# Altium PCB PCB1.PcbDoc
Units mil, origin at the board's own origin, x right, y up, seen from the top; angles counter-clockwise.
Board outline 6000 x 4000 mil, 2 copper layers (Top Layer, Bottom Layer); 21 components, 14 nets, 47 pads, 0 vias.
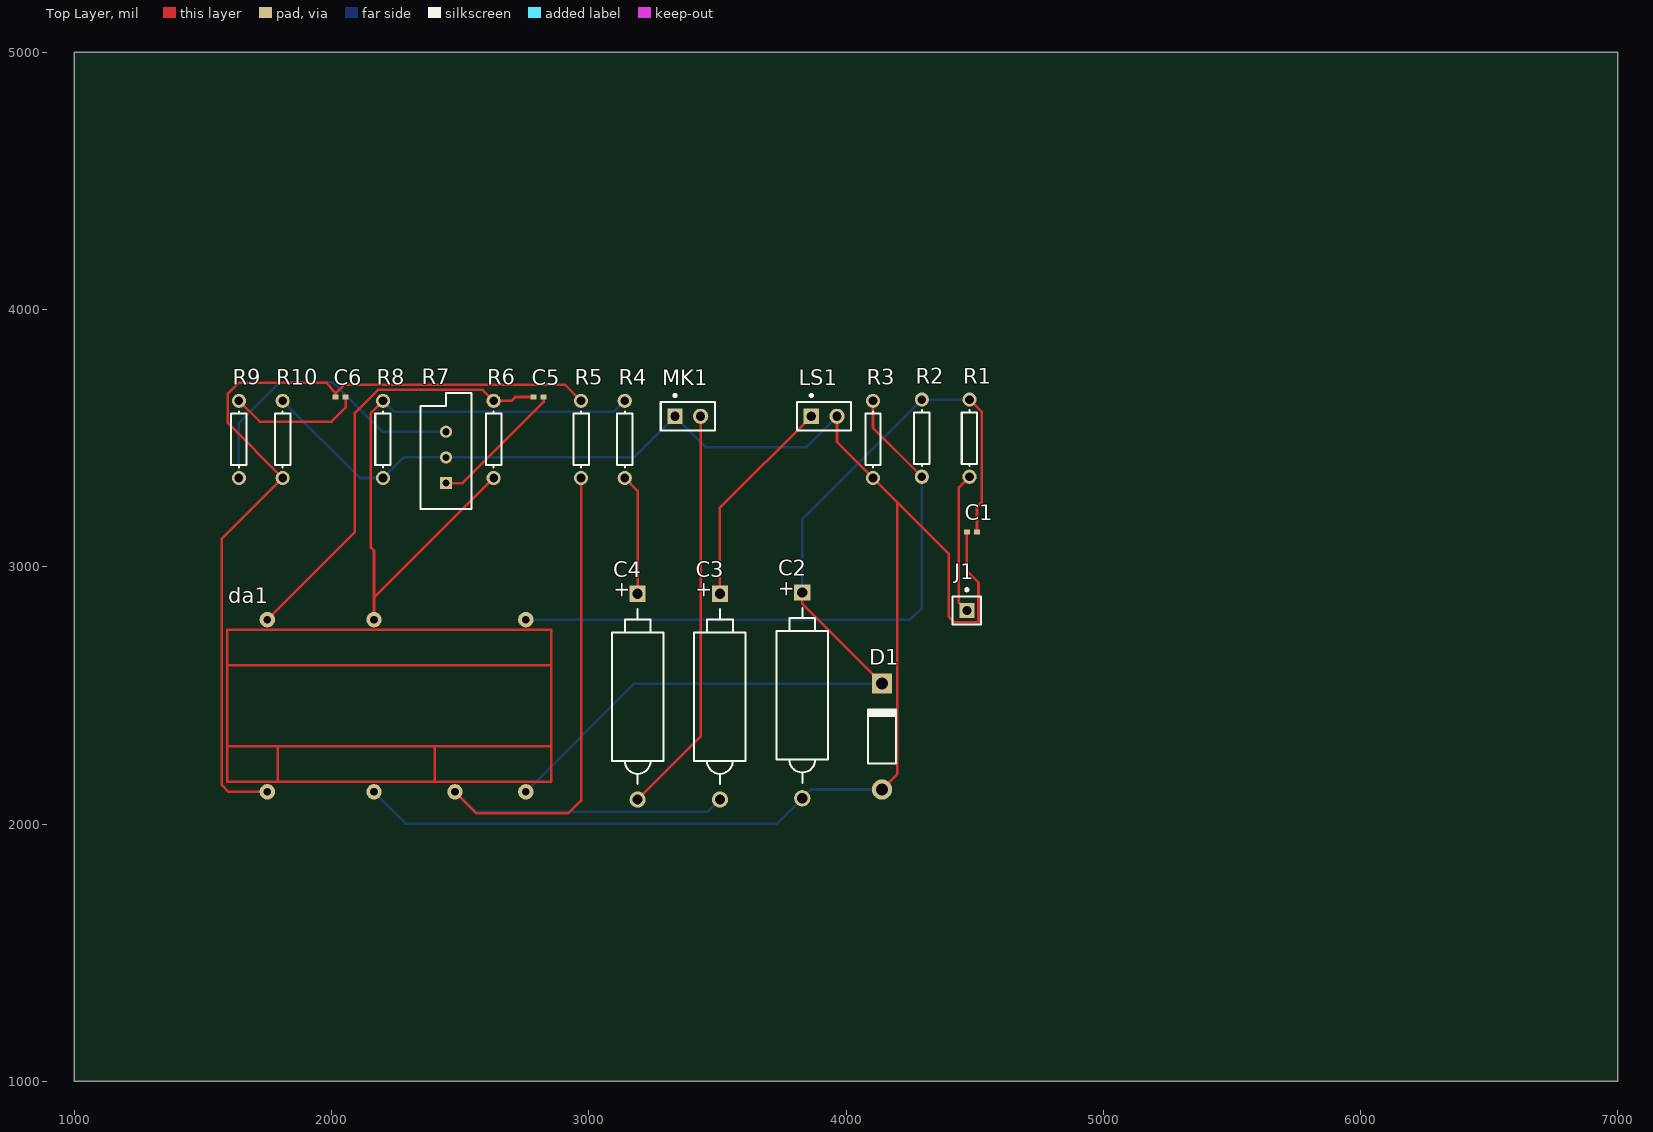
[diagram p0: Top Layer view]
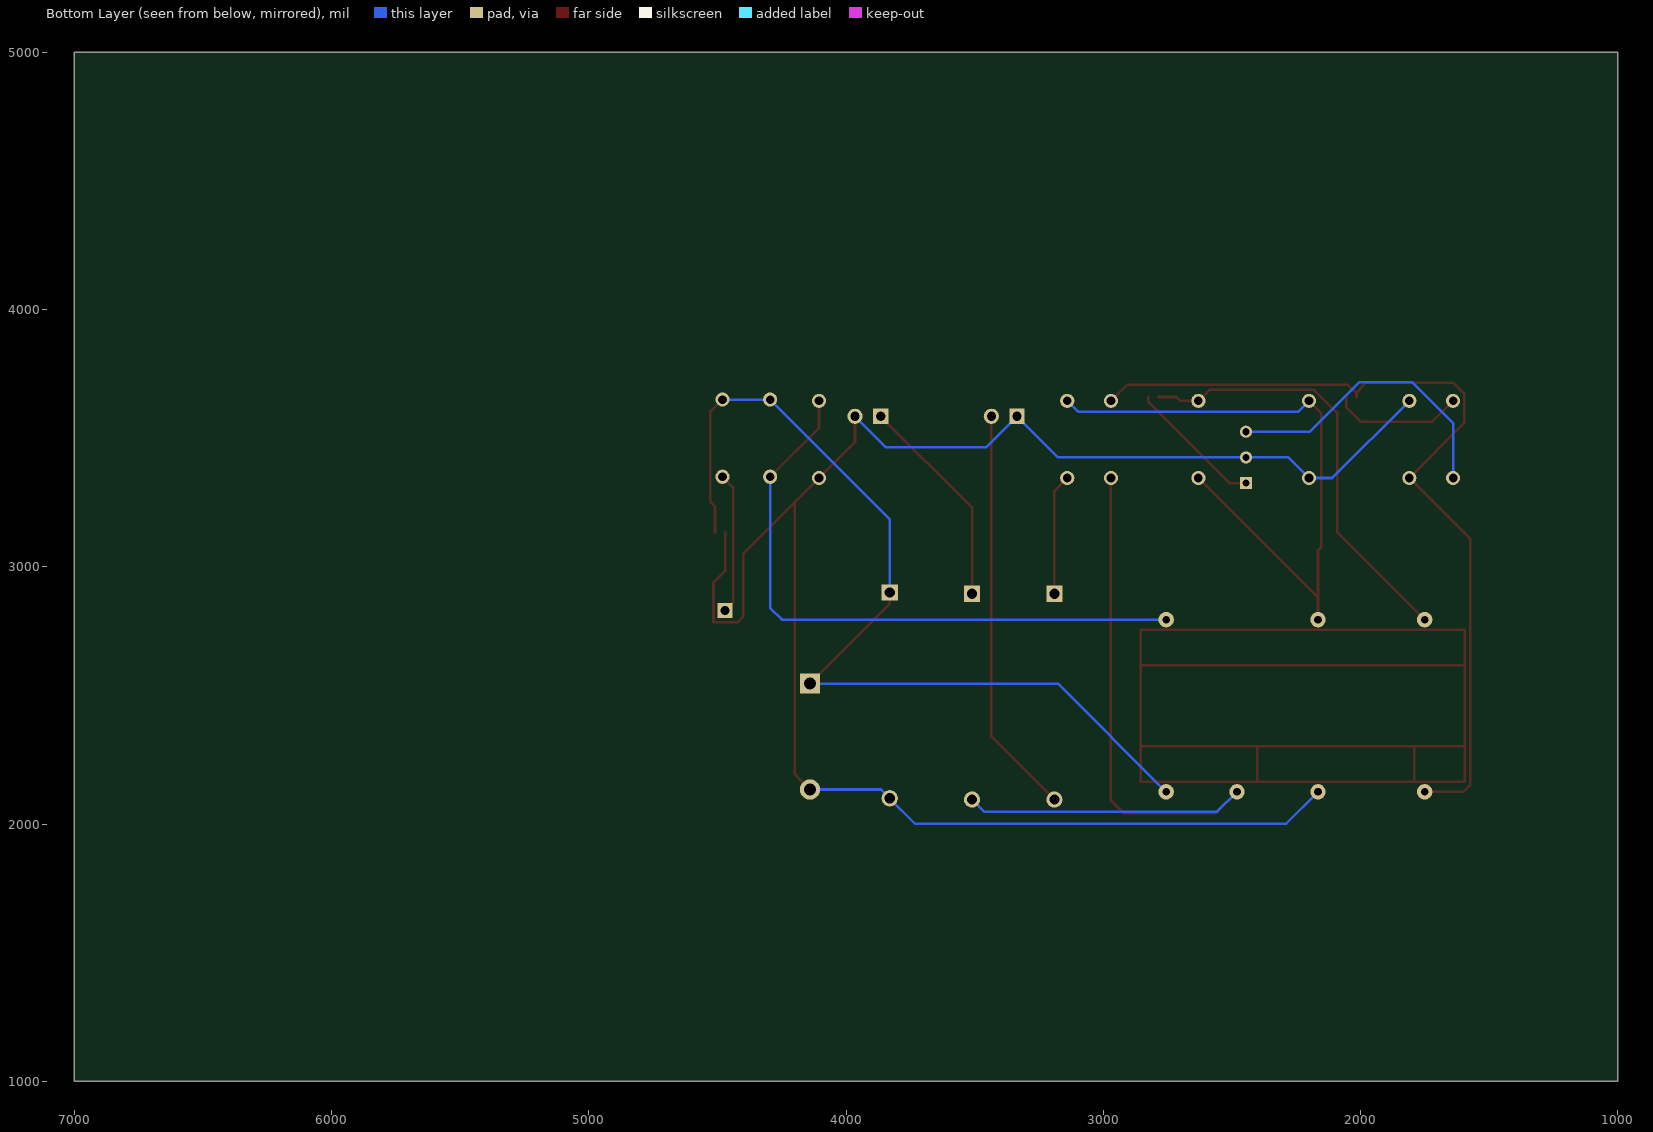
[diagram p1: Bottom Layer view, seen from below]

## Layer stack, top to bottom
Top Solder: solder mask 0.4, Solder Resist, Dk 3.5
Top Layer: signal copper 1.4
Dielectric 1: dielectric 12.6, FR-4, Dk 4.8
Bottom Layer: signal copper 1.4
Bottom Solder: solder mask 0.4, Solder Resist, Dk 3.5

## Board outline
1000,1000 7000,1000 7000,5000 1000,5000

## Design rules (kind name [scope] priority, off if disabled: settings)
Clearance [All] p1: gap=10 ignorepadtopadclearanceinfootprint=FALSE except(0: Arc-Hole Track-Hole SMDPad-Hole THPad-Hole Via-Hole Fill-Hole Poly-Hole Region-Hole Text-Hole)
PolygonConnect [All] p1: connectstyle=Relief reliefconductorwidth=10 reliefentries=4 polygonreliefangle="90 Angle" airgapwidth=10
RoutingVias [All] p1: holewidth=28 width=50 viastyle="Through Hole" minholewidth=28 minwidth=50 maxholewidth=28 maxwidth=50
SolderMaskExpansion [All] p1: expansion=4 istentingtop=FALSE
Width [All] p1: maxlimit=10 minlimit=10 preferedwidth=10
30 further rules are at their usual default settings.

## Components (designator, comment, footprint, x,y, rotation, side; value= is the part's Value field where it differs from the comment)
C1 "Cap Semi" 0402 4489.69,3135 r0 top value=100pF
C2 "Cap Pol2" POLAR0.8 3830,2500 r90 top value=100pF
C3 "Cap Pol2" POLAR0.8 3510,2495 r90 top value=100pF
C4 "Cap Pol2" POLAR0.8 3190,2495 r90 top value=100pF
C5 "Cap Semi" 0402 2805,3660 r0 top value=100pF
C6 "Cap Semi" 0402 2035,3660 r0 top value=100pF
D1 "Diode 11DQ03" DO-204AL 4140,2340 r90 top
da1 "KC133A" PCBComponent_1 2460.28,2459.65 r270 top
J1 "Socket" PIN1 4470,2830 r0 top
LS1 "Speaker" PIN2 3865,3585 r0 top
MK1 "Mic2" PIN2 3335,3585 r0 top
R1 "Res1" AXIAL-0.3 4480,3500 r90 top value=1K
R2 "Res1" AXIAL-0.3 4295,3500 r90 top value=1K
R3 "Res1" AXIAL-0.3 4105,3495 r90 top value=1K
R4 "Res1" AXIAL-0.3 3140,3495 r90 top value=1K
R5 "Res1" AXIAL-0.3 2970,3495 r90 top value=1K
R6 "Res1" AXIAL-0.3 2630,3495 r90 top value=1K
R7 "RPot" VR5 2445,3425 r90 top value=1K
R8 "Res1" AXIAL-0.3 2200,3495 r90 top value=1K
R9 "Res1" AXIAL-0.3 1640,3495 r90 top value=1K
R10 "Res1" AXIAL-0.3 1810,3495 r90 top value=1K

## Footprints (in the part's own frame and the unit in brackets; to place one, negate y for a bottom-side part, rotate by r counter-clockwise, add the part's x,y. Pads: shape width x height; smd on the part's side, far side on the other; paste and mask are expansions set on the pad)
0402 [mm] "Chip Capacitor, Body 1.0x0.5mm, IPC High Density"
  rect 0.6x0.5 smd: 1(-0.5,0) 2(0.5,0)
  body extent -0.55,-0.3 0.55,0.3, height 1.3
AXIAL-0.3 [mm] "Axial Device, Thru-Hole; 2 Leads; 0.3 in Pin Spacing"
  round 1.4 hole 0.85: 1(-3.81,0) 2(3.81,0)
  silkscreen extent -2.77,-0.76 2.77,0.76
DO-204AL [mm] "Diode, Axial; Body 5.2 x 2.7 mm (LxDia. max), Lead Dia. 0.86 mm (max)"
  round 2 hole 1.2: 1(-5.23,0)
  rect 2x2 hole 1.2: 2(5.23,0)
  silkscreen extent -2.65,-1.4 2.75,1.4
PCBComponent_1 [mil]
  round 60 hole 30: 1(-334.65,-710) 2(334.65,-710) 3(-334.65,295.28) 4(334.65,-295.28) 5(334.65,19.68) 7(334.65,295.28) 8(-334.65,-295.28)
  Top Layer lines w10: 157.48,-866.14 157.48,393.7 ; -157.48,-866.14 -157.48,393.7 ; 295.28,-669.29 157.48,-669.29 ; 295.28,-59.06 157.48,-59.06 ; 295.28,-866.14 -295.28,-866.14 -295.28,393.7 295.28,393.7 295.28,-866.14
PIN1 [mm] "Connector; Plug"
  rect 1.5x1.5 hole 0.9: 1(0,0)
  silkscreen extent -1.4,-1.4 1.4,2.17
PIN2 [mm] "Photosensitive Diode; 2 Leads"
  rect 1.5x1.5 hole 0.9: 1(0,0)
  round 1.5 hole 0.9: 2(2.54,0)
  silkscreen extent -1.4,-1.4 3.94,2.17
POLAR0.8 [mm] "Polarized Capacitor; 2 Leads"
  rect 1.6x1.6 hole 1: 1(10.16,0)
  round 1.6 hole 1: 2(-10.16,0)
  silkscreen extent -8.64,-2.54 8.64,2.54
VR5 [mm] "Thru-Hole; 3 Leads"
  rect 1.2x1.2 hole 0.7: 1(-2.54,0)
  round 1.2 hole 0.7: 2(0,0) 3(2.54,0)
  silkscreen extent -5.08,-2.54 6.35,2.54

## Part data
C1 C5 C6: "Capacitor (Semiconductor SIM Model)", LatestRevisionDate=29-May-2009, LatestRevisionNote="IPC-7351 Footprint Added.", PackageDescription="Chip Capacitor", PackageReference=C1206, Published=8-Jun-2000, Publisher="Altium Limited"
C2 C3 C4: "Polarized Capacitor (Axial)", LatestRevisionDate=17-Jul-2002, LatestRevisionNote="Re-released for DXP Platform.", PackageDescription="Polarized Capacitor; 2 Leads", PackageReference=POLAR0.8, Published=8-Jun-2000, Publisher="Altium Limited"
D1: "Schottky Rectifier", Code_JEDEC=DO-204-AL, ComponentLink1Description="Manufacturer Link", ComponentLink1URL=http://www.irf.com/, ComponentLink2Description=Datasheet, ComponentLink2URL=http://www.irf.com/product-info/datasheets/data/11dq03.pdf, DatasheetVersion=Dec-1997, LatestRevisionDate=17-Jul-2002, LatestRevisionNote="Re-released for DXP Platform.", PackageDescription="Diode, Axial; Body 5.2 x 2.7 mm (LxDia. max), Lead Dia. 0.86 mm (max)", PackageReference=DO-204AL, Published=8-Jun-2000, Publisher="Altium Limited"
LS1: "Loudspeaker", LatestRevisionDate=17-Jul-2002, LatestRevisionNote="Re-released for DXP Platform.", PackageReference=PIN2, Published=24-Mar-1999, Publisher="Altium Limited"
MK1: "Microphone", LatestRevisionDate=17-Jul-2002, LatestRevisionNote="Re-released for DXP Platform.", PackageReference=PIN2, Published=24-Mar-1999, Publisher="Altium Limited"
R1 R2 R3 R4 R5 R6 R8 R9 R10: "Resistor", LatestRevisionDate=17-Jul-2002, LatestRevisionNote="Re-released for DXP Platform.", PackageDescription="Axial Device, Thru-Hole; 2 Leads; 0.3 in Pin Spacing", PackageReference=AXIAL-0.3, Published=8-Jun-2000, Publisher="Altium Limited"
R7: "Potentiometer", LatestRevisionDate=17-Jul-2002, LatestRevisionNote="Re-released for DXP Platform.", PackageDescription="Variable Resistor, Thru-Hole; 3 Leads", PackageReference=VR5, Published=8-Jun-2000, Publisher="Altium Limited", Set Position=0.5, Sim Note="Enter the Resistance value and the set point into parameter fields."
J1: LatestRevisionDate=17-Jul-2002, LatestRevisionNote="Re-released for DXP Platform.", Publisher="Altium Limited"

## Nets (pads, with @x,y where several pads share a name; then routed paths per layer and width w, separated by ;. In a path a pad name is that pad's centre, name@x,y a point inside that pad or via, vN(x,y) a via of type N, cw(c..) or ccw(c..) an arc to the next point about the centre after c; other vN are vias at no path point)
GND: C1.1 C2.2 D1.1 da1.4 LS1.2 MK1.1 R3.1 R7.2 R8.1 R10.2 | length 7153.9
  Top Layer w10: LS1.2 3965,3485 R3.1 4199,3251 ; D1.1 4199,2193.09 4199,3251 ; C1.1 4470,2983 4515,2938 4515,2785 4420,2785 4400,2805 4400,3050 4199,3251
  Bottom Layer w10: R10.2 2110,3345 R8.1 2280,3425 R7.2 3175,3425 MK1.1 3456,3464 3844,3464 LS1.2 ; da1.4 2289,2001 3731,2001 C2.2 3864.09,2134.09 D1.1
NetC1_2: C1.2 C2.1 D1.2 da1.7 R1.2 R2.2 | length 3710.7
  Top Layer w10: C2.1 3830,2855.91 D1.2 ; R1.2 4527,3603 4527,3251 4509.37,3233.37 C1.2
  Bottom Layer w10: da1.7 3176.46,2545.91 D1.2 ; C2.1 3830,3185 R2.2 R1.2
NetC3_1: C3.1 LS1.1 | length 837
  Top Layer w10: C3.1 3510,3230 LS1.1
NetC3_2: C3.2 da1.5 R5.1 | length 2880.9
  Top Layer w10: da1.5 2563.96,2041 2920,2041 2970,2091 R5.1
  Bottom Layer w10: da1.5 2556.96,2048 3463,2048 C3.2
NetC4_1: C4.1 R4.1 | length 470.7
  Top Layer w10: R4.1 3190,3295 C4.1
NetC4_2: C4.2 MK1.2 | length 1591.5
  Top Layer w10: C4.2 3435,2340 MK1.2
NetC5_1: C5.1 da1.1 R6.2 | length 1700.4
  Top Layer w10: da1.1 2091,3135.02 2091,3598.56 2180,3687.56 2587.44,3687.56 R6.2 2700,3645 2715,3660 C5.1
NetC5_2: C5.2 R7.1 | length 530.2
  Top Layer w10: R7.1 2509.69,3325 2824.69,3640 C5.2
NetC6_1: C6.1 da1.2 R5.2 R10.1 | length 3359.3
  Top Layer w10: da1.2 1600,2125 1574,2151 1574,3109 R10.1 1597,3558 1597,3673 1640,3716 1980,3716 2015.32,3673.32 ; C6.1 2015.32,3673.32 ; R5.2 2907.44,3707.56 2049.56,3707.56 2015.32,3673.32
NetC6_2: C6.2 R9.2 | length 512.2
  Top Layer w10: R9.2 1721,3564 2000,3564 2054.69,3618.69 C6.2
Netda1_3: da1.3 R2.1 R3.2 | length 2442.1
  Top Layer w10: R3.2 4105,3540 R2.1
  Bottom Layer w10: da1.3 4249.29,2794.29 4295,2840 R2.1
Netda1_8: da1.8 R4.2 R6.1 R8.2 | length 2508.4
  Top Layer w10: da1.8 2165,2880 ; R8.2 2153,3598 2153,3075 2165,3063 2165,2880 ; R6.1 2165,2880
  Bottom Layer w10: R8.2 2243,3602 3097,3602 R4.2
NetJ1_1: J1.1 R1.1 | length 549.8
  Top Layer w10: J1.1 4439,2861 4439,3309 R1.1
NetR7_3: R7.3 R9.1 | length 1164.2
  Bottom Layer w10: R9.1 1640,3558 1800,3718 2004,3718 2197,3525 R7.3

## Text inside footprints (layer, text, board x,y; h text height)
C2: Top Overlay "+" at 3792.6,2880 h59.06 r90
C3: Top Overlay "+" at 3472.6,2875 h59.06 r90
C4: Top Overlay "+" at 3152.6,2875 h59.06 r90